# Altium PCB ISP_medium_main.PcbDoc
Units mm, origin at the board's own origin, x right, y up, seen from the top; angles counter-clockwise.
Board outline 24.4 x 77 mm, 2 copper layers (Top Layer, Bottom Layer); 30 components, 24 nets, 116 pads, 12 vias.
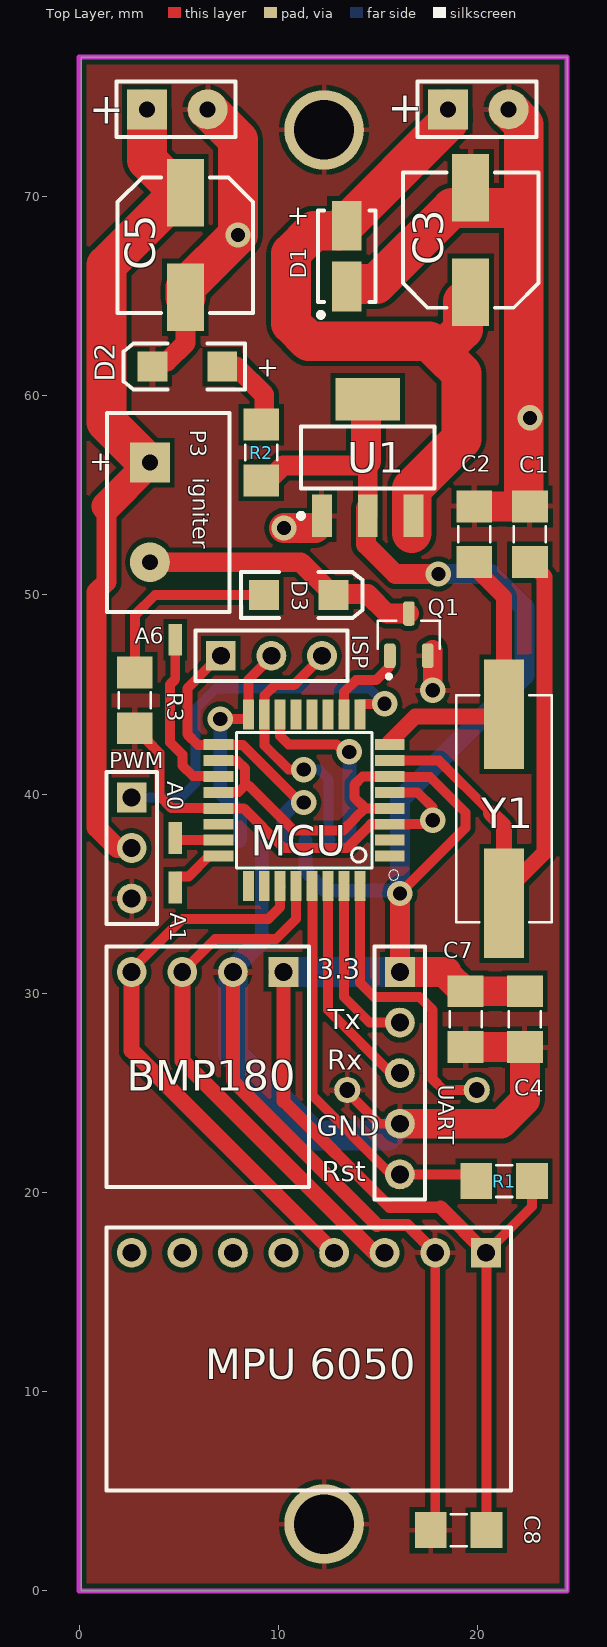
[diagram p0: Top Layer view]
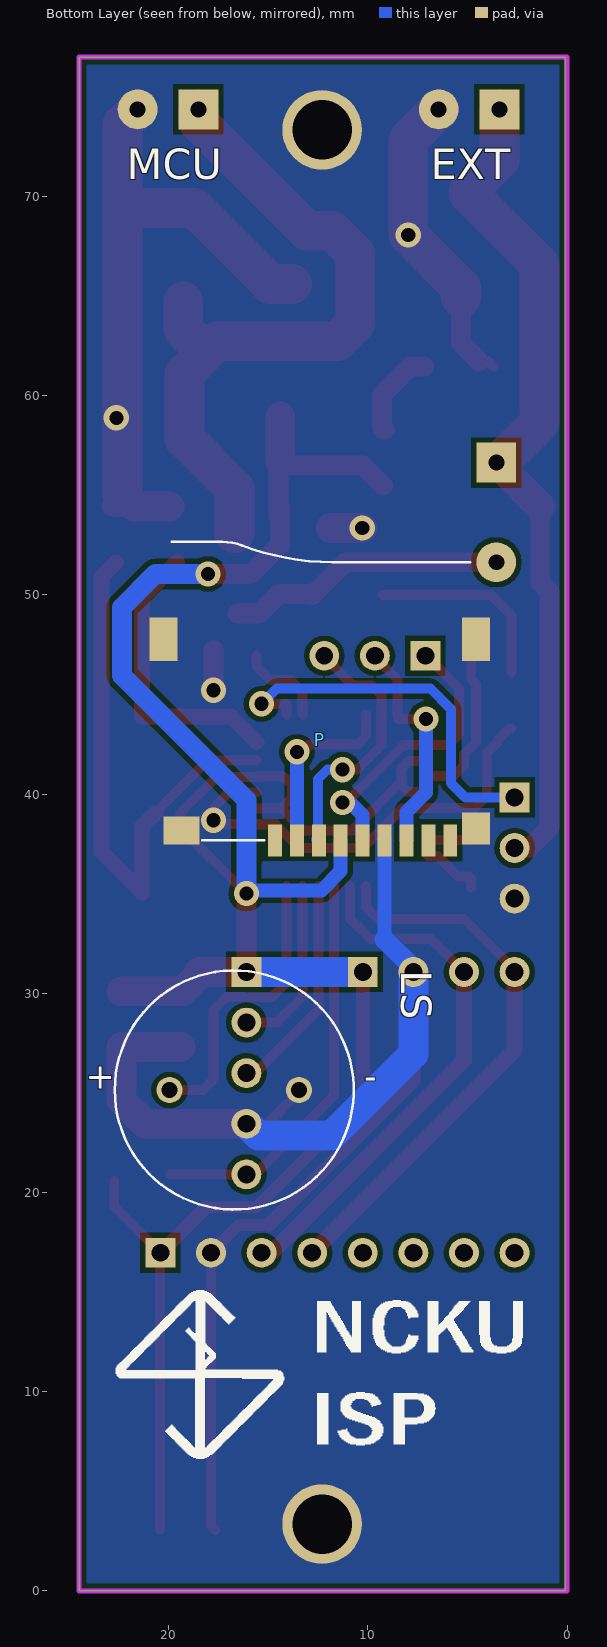
[diagram p1: Bottom Layer view, seen from below]

## Layer stack, top to bottom
Top Solder: solder mask 0.0102, Solder Resist, Dk 3.5
Top Layer: signal copper 0.0356
Dielectric 1: dielectric 0.32, FR-4, Dk 4.8
Bottom Layer: signal copper 0.0356
Bottom Solder: solder mask 0.0102, Solder Resist, Dk 3.5

## Board outline
0.099,77 0.099,0 24.5,0 24.5,77

## Design rules (kind name [scope] priority, off if disabled: settings)
Clearance Clearance_2 [InNamedPolygon('GND_L01_P002')] p1: gap=0.254 ignorepadtopadclearanceinfootprint=FALSE except(0: Arc-Hole Track-Hole SMDPad-Hole THPad-Hole Via-Hole Fill-Hole Poly-Hole Region-Hole Text-Hole)
Clearance Clearance_1 [InNamedPolygon('GND_L01_P002')] p2: gap=0.254 ignorepadtopadclearanceinfootprint=FALSE except(0: Arc-Hole Track-Hole SMDPad-Hole THPad-Hole Via-Hole Fill-Hole Poly-Hole Region-Hole Text-Hole)
Clearance [All] p3: gap=0.254 ignorepadtopadclearanceinfootprint=FALSE except(0: Arc-Hole Track-Hole SMDPad-Hole THPad-Hole Via-Hole Fill-Hole Poly-Hole Region-Hole Text-Hole; 0.1: SMDPad-SMDPad)
HoleSize [All] p1: absolutevalues=TRUE maxlimit=10 minlimit=0.025 maxpercent=80.000 minpercent=20.000
MinimumSolderMaskSliver [All] p1 off: minsoldermaskwidth=0.254
PolygonConnect direct_connect_2 [All vs IsNamedPolygon('GND_L02_P006')] p1: connectstyle=Direct reliefconductorwidth=0.254 reliefentries=4 polygonreliefangle="90 Angle" airgapwidth=0.254 // direct connect
PolygonConnect direct_connect_1 [All vs IsNamedPolygon('GND_L02_P006')] p2: connectstyle=Direct reliefconductorwidth=0.254 reliefentries=4 polygonreliefangle="90 Angle" airgapwidth=0.254
PolygonConnect direct_connect [All vs IsNamedPolygon('GND_L02_P006')] p3: connectstyle=Direct reliefconductorwidth=0.254 reliefentries=4 polygonreliefangle="90 Angle" airgapwidth=0.254
PolygonConnect PolygonConnect_2 [All vs IsNamedPolygon('GND_L01_P002')] p4: thpad.connectstyle=Relief thpad.reliefconductorwidth=0.254 thpad.reliefentries=4 thpad.polygonreliefangle="90 Angle" thpad.airgapwidth=0.5 smdpad.connectstyle=Relief smdpad.reliefconductorwidth=0.254 smdpad.reliefentries=4 smdpad.polygonreliefangle="90 Angle" smdpad.airgapwidth=0.254 via.connectstyle=Relief via.reliefconductorwidth=0.254 via.reliefentries=4 via.polygonreliefangle="90 Angle" via.airgapwidth=0.254
PolygonConnect PolygonConnect_1 [All vs IsNamedPolygon('GND_L01_P002')] p5: thpad.connectstyle=Relief thpad.reliefconductorwidth=0.254 thpad.reliefentries=4 thpad.polygonreliefangle="90 Angle" thpad.airgapwidth=0.5 smdpad.connectstyle=Relief smdpad.reliefconductorwidth=0.254 smdpad.reliefentries=4 smdpad.polygonreliefangle="90 Angle" smdpad.airgapwidth=0.254 via.connectstyle=Relief via.reliefconductorwidth=0.254 via.reliefentries=4 via.polygonreliefangle="90 Angle" via.airgapwidth=0.254
PolygonConnect [All] p6: connectstyle=Relief reliefconductorwidth=0.254 reliefentries=4 polygonreliefangle="90 Angle" airgapwidth=0.254
RoutingVias [All] p1: holewidth=0.711 width=1.27 viastyle="Through Hole" minholewidth=0.711 minwidth=1.27 maxholewidth=0.711 maxwidth=1.27
SilkToSolderMaskClearance [IsPad] p1: minsilkscreentomaskgap=0.17 clearancetoexposedcopper=TRUE
SolderMaskExpansion [All] p1: expansion=0.102
Width [All] p1: maxlimit=5 minlimit=0.254 preferedwidth=0.5
27 further rules are at their usual default settings.

## Components (designator, comment, footprint, x,y, rotation, side; value= is the part's Value field where it differs from the comment)
+ "PowerIn" PowerIn 18.514,74.378 r0 top (schematic designator P5)
+ "PowerIn" PowerIn 3.401,74.378 r0 top (schematic designator P4)
A0 "Extendable" Extendable 4.826,37.293 r0 top (schematic designator E1)
A1 "Extendable" Extendable 4.826,35.814 r180 top (schematic designator E2)
A6 "Extendable" Extendable 4.826,48.26 r180 top (schematic designator E5)
BMP180 "BMP180" BMP280 10.259,31.071 r180 top
C1 "22pF" CAP1602 22.631,53.046 r90 top
C2 "22pF" CAP1602 19.837,53.046 r270 top
C3 "470uF" CAPAE7066X77M 19.657,67.818 r90 top
C4 "22uF" CAP1602 22.377,28.702 r270 top
C5 "470uF" CAPAE7066X77M 5.334,67.564 r270 top
C7 "22pF" CAP1602 19.403,28.702 r90 top
C8 "22pF" CAP1602 19.05,3.048 r0 top
D1 "Diode" DIOM4227X24N 13.434,67.012 r90 top
D2 "LED2" 3.2X1.6X1.1 5.433,61.468 r180 top
D3 "LED2" 3.2X1.6X1.1 11.025,49.994 r0 top
ISP "ISP connector" "ISP connector" 7.112,46.946 r0 top (schematic designator P1)
LS "CEM-1201(42)" CUI_CEM-1201(42) 16.712,25.146 r180 bottom
MCU "*" QFP80P900X900X120-32N 11.293,39.688 r180 top
"MPU 6050" "Mpu Chip 8Pin" "Mpu 8Pin" 20.419,16.974 r180 top
P "ST-TF-003A" MicroSD 11.148,43.009 r0 bottom
P3 "MosOutput" KF126-2P-Connector 3.556,56.642 r270 top
PWM "Servo" Servo 2.639,39.834 r270 top
Q1 "MOSFET-N" SOT23-3 16.552,48.006 r90 top
R1 "Res1" "RES 1602" 21.336,20.574 r0 top value=10K
R2 "Res1" "RES 1602" 9.143,57.15 r270 top value=220
R3 "Res1" "RES 1602" 2.794,44.704 r90 top value=1k
U1 "AMS1117-3.3" SOT230P700X180-4N 14.489,56.896 r90 top
UART "UART" UART 16.101,31.071 r270 top
Y1 "Xtal" XTAL 21.336,39.263 r270 top

## Footprints (in the part's own frame and the unit in brackets; to place one, negate y for a bottom-side part, rotate by r counter-clockwise, add the part's x,y. Pads: shape width x height; smd on the part's side, far side on the other; paste and mask are expansions set on the pad)
3.2X1.6X1.1 [mm] "SMT LED; 2 Flat Leads"
  rect 1.5x1.5 smd: 1(-1.75,0) 2(1.75,0)
  silkscreen extent -2.9,-1.15 3.2,1.15
BMP280 [mm] "Connector; 4 Pins for I2C"
  rect 1.5x1.5 hole 0.9: 1(0,0)
  round 1.5 hole 0.9: 2(2.54,0) 3(5.08,0) 4(7.62,0)
  silkscreen extent -1.27,-1.27 8.89,10.8
CAP1602 [mm]
  rect 1.6x1.8 smd: 1(-1.4,0) 2(1.4,0)
  silkscreen extent -0.4,-0.8 0.4,0.8
CAPAE7066X77M [mm] "Aluminum Electrolytic Capacitor, Body 6.60x6.60x7.70mm, IPC Low Density"
  rect 3.4x1.85 smd: 1(-2.625,0) 2(2.625,0)
  silkscreen extent -3.4,-3.4 3.4,3.4, body extent -3.4,-3.4 3.4,3.4, height 7.7
CUI_CEM-1201(42) [mm]
  round 1.308 hole 0.8: M(3.25,0) P(-3.25,0)
  silkscreen extent -6,-6 6,6
DIOM4227X24N [mm] "Molded Diode, 2-Leads, Body 4.25x2.69mm, IPC Medium Density"
  rect 2.5x1.5 smd: 1(-1.525,0) 2(1.525,0)
  silkscreen extent -3.07,-1.45 2.3,1.45, body extent -2.3,-1.44 2.3,1.45, height 2.44
Extendable [mm]
  rect 0.7x1.6 smd: 1(0,0.508)
"ISP connector" [mm] "Connector; Header; 3 Position"
  rect 1.5x1.5 hole 0.9: 1(0,0)
  round 1.5 hole 0.9: 2(2.54,0) 3(5.08,0)
  silkscreen extent -1.27,-1.27 6.35,1.27
KF126-2P-Connector [mm] "Connector; Header; 2 Position"
  rect 2x2 hole 0.8: 1(0,0)
  round 2 hole 0.8: 2(5,0)
  silkscreen extent -2.5,-2.16 7.5,4
MicroSD [mm]
  rect 0.7x1.6 smd: 1(3.52,5.33) 2(2.42,5.33) 3(1.32,5.33) 4(0.22,5.33) 5(-0.88,5.33) 6(-1.98,5.33) 7(-3.08,5.33) 8(-4.18,5.33) 9(-5.28,5.33)
  rect 1.4x1.6 smd: G1(-6.58,4.73)
  rect 1.4x2.2 smd: G2(-6.58,-4.77) G3(9.12,-4.77)
  rect 1.8x1.4 smd: G4(8.22,4.83)
  silkscreen extent -6.29,-9.66 8.7,5.33
"Mpu 8Pin" [mm] "Connector; Header; 8 Position"
  rect 1.5x1.5 hole 0.9: 1(0,0)
  round 1.5 hole 0.9: 2(2.54,0) 3(5.08,0) 4(7.62,0) 5(10.16,0) 6(12.7,0) 7(15.24,0) 8(17.78,0)
  silkscreen extent -1.27,-1.27 19.05,11.94
PowerIn [mm] "Connector; Header; 2 Position"
  rect 2x2 hole 0.8: 1(0,0)
  round 2 hole 0.8: 2(3.048,0)
  silkscreen extent -1.52,-1.4 4.44,1.4
QFP80P900X900X120-32N [mm]
  rect 1.5x0.55 smd: 1(-4.3,2.8) 2(-4.3,2) 3(-4.3,1.2) 4(-4.3,0.4) 5(-4.3,-0.4) 6(-4.3,-1.2) 7(-4.3,-2) 8(-4.3,-2.8) 17(4.3,-2.8) 18(4.3,-2) 19(4.3,-1.2) 20(4.3,-0.4) 21(4.3,0.4) 22(4.3,1.2) 23(4.3,2) 24(4.3,2.8)
  rect 0.55x1.5 smd: 9(-2.8,-4.3) 10(-2,-4.3) 11(-1.2,-4.3) 12(-0.4,-4.3) 13(0.4,-4.3) 14(1.2,-4.3) 15(2,-4.3) 16(2.8,-4.3) 25(2.8,4.3) 26(2,4.3) 27(1.2,4.3) 28(0.4,4.3) 29(-0.4,4.3) 30(-1.2,4.3) 31(-2,4.3) 32(-2.8,4.3)
  silkscreen extent -4.75,-3.4 3.4,4
"RES 1602" [mm]
  rect 1.6x1.8 smd: 1(-1.4,0) 2(1.4,0)
  silkscreen extent -0.4,-0.8 0.4,0.8
Servo [mm] "Connector; Header; 3 Position"
  rect 1.5x1.5 hole 0.9: 1(0,0)
  round 1.5 hole 0.9: 2(2.54,0) 3(5.08,0)
  silkscreen extent -1.27,-1.27 6.35,1.27
SOT23-3 [mm]
  rrect50% 1.23x0.59 smd: 1(-1.06,0.95) 2(-1.06,-0.95) 3(1.06,0)
  silkscreen extent -2.2,-1.56 0.7,1.56
SOT230P700X180-4N [mm] "SOT223, 4-Leads, Body 6.50x7.00mm (avg), Pitch 2.30mm, IPC Medium Density"
  rect 2.15x1 smd: 1(-2.925,2.3) 2(-2.925,0) 3(-2.925,-2.3)
  rect 2.15x3.25 smd: 4(2.925,0)
  silkscreen extent -3.05,-3.35 1.55,3.47, body extent -1.85,-3.35 1.85,3.35, height 1.8
UART [mm] "Connector; Header; 5 Position, UART, for uploading"
  rect 1.5x1.5 hole 0.9: 1(0,0)
  round 1.5 hole 0.9: 2(2.54,0) 3(5.08,0) 4(7.62,0) 5(10.16,0)
  silkscreen extent -1.27,-1.27 11.43,1.27
XTAL [mm]
  rect 5.5x2 smd: 1(-4.75,0) 2(4.75,0)
  silkscreen extent -5.7,-2.4 5.7,2.4

## Part data
+ + P3: "Header, 2-Pin", LatestRevisionDate=17-Jul-2002, LatestRevisionNote="Re-released for DXP Platform.", Publisher="Altium Limited"
BMP180: "Chip Connector 4 Pin for BMP180", LatestRevisionDate=17-Jul-2002, LatestRevisionNote="Re-released for DXP Platform.", Publisher="Altium Limited"
C1 C2 C7 C8: "SMD Capacitor X6S(EIA) with Capacitance: 22pF", Package="1206 Murata", Availability=Warning, Check_prices=https://www.snapeda.com/parts/GRM319C81C106MA12J/Murata/view-part/1894707/?ref=eda, MF=Murata, MP=GRM319C81C106MA12J, Price=None, Purchase-URL=https://pricing.snapeda.com/search/part/GRM319C81C106MA12J/?ref=eda, SnapEDA_Link=https://www.snapeda.com/parts/GRM319C81C106MA12J/Murata/view-part/1894707/?ref=snap
C3 C5: "470£gF 16V Aluminum Electrolytic Capacitors Radial", Package="Radial Panasonic", Availability=Unavailable, MF=Panasonic, MP=EEE-FC1C471AP, Price=None, SnapEDA_Link=https://www.snapeda.com/parts/EEE-FC1C471AP/Panasonic%20Electronic%20Components/view-part/51969/?ref=snap
C4: library part 100nF, "SMD Capacitor X6S(EIA) with Capacitance: 22pF", Package="1206 Murata", Availability=Warning, Check_prices=https://www.snapeda.com/parts/GRM319C81C106MA12J/Murata/view-part/1894707/?ref=eda, MF=Murata, MP=GRM319C81C106MA12J, Price=None, Purchase-URL=https://pricing.snapeda.com/search/part/GRM319C81C106MA12J/?ref=eda, SnapEDA_Link=https://www.snapeda.com/parts/GRM319C81C106MA12J/Murata/view-part/1894707/?ref=snap
D1: "Default Diode", Code_JEDEC=DO-214-AB, LatestRevisionDate=17-Jul-2002, LatestRevisionNote="Re-released for DXP Platform.", PackageDescription="DO-214-AB/SMC; 2 C-Bend Leads; Body 7.9 x 5.9 mm, inc. leads (LxW)", PackageReference=SMC, PackageVersion=Sep-1996, Published=8-Jun-2000, Publisher="Altium Limited"
D2 D3: "Typical RED, GREEN, YELLOW, AMBER GaAs LED", LatestRevisionDate=17-Jul-2002, LatestRevisionNote="Re-released for DXP Platform.", PackageDescription="SM LED; 2 Flat Leads", PackageReference=3.2X1.6X1.1, PackageVersion=Feb-2002, Published=8-Jun-2000, Publisher="Altium Limited"
ISP PWM: "Header, 3-Pin", LatestRevisionDate=17-Jul-2002, LatestRevisionNote="Re-released for DXP Platform.", Publisher="Altium Limited"
LS: "12 mm, 1,5 V, 85 dB, furo passante, campainha elActrica transdutora de A!udio magnActica", Package="CUI Inc.", Availability=Unavailable, CUI_purchase_URL=https://www.cuidevices.com/product/audio/buzzers/audio-transducers/cem-1201_42_?utm_source=snapeda.com&utm_medium=referral&utm_campaign=snapedaBOM, MF="CUI Devices", MP=CEM-1201_42_, Price=None, SnapEDA_Link=https://www.snapeda.com/parts/CEM-1201%2842%29/CUI%20Devices/view-part/2755977/?ref=snap
MCU: library part ATMEGA328P-AU, "AVR AVRAR ATmega Microcontroller IC 8-Bit 20MHz 32KB _16K x 16_ FLASH 32-TQFP _7x7_", Package="TQFP-32 Microchip Technology", Availability=Unavailable, MF="Microchip Technology", MP=ATMEGA328P-AU, Price=None, SnapEDA_Link=https://www.snapeda.com/parts/ATMEGA328P-AU/Microchip/view-part/4593405/?ref=snap
"MPU 6050": library part "Chip Mpu 8Pin", "Chip Mpu 8Pin", LatestRevisionDate=17-Jul-2002, LatestRevisionNote="Re-released for DXP Platform.", Publisher="Altium Limited"
P: "Micro SD Card Socket", Package=None, Availability=Unavailable, MF=Suntech, MP=ST-TF-003A, Price=None, SnapEDA_Link=https://www.snapeda.com/parts/ST-TF-003A/Suntech/view-part/214778/?ref=snap
Q1: "N-Channel MOSFET", LatestRevisionDate=17-Jul-2002, LatestRevisionNote="Re-released for DXP Platform.", PackageDescription="TO, Flat Index; 3 In-Line, Axial Leads; Body Dia. 4.6mm; Lead Dia. 0.5 mm (max)", PackageReference=E3, PackageVersion=1995/1996, Published=8-Jun-2000, Publisher="Altium Limited"
R1 R2 R3: "Resistor", LatestRevisionDate=17-Jul-2002, LatestRevisionNote="Re-released for DXP Platform.", PackageDescription="Axial Device, Thru-Hole; 2 Leads; 0.3 in Pin Spacing", PackageReference=AXIAL-0.3, Published=8-Jun-2000, Publisher="Altium Limited"
U1: "Sot223/Pkg 1-Amp 3.3-Volt Low Drop Out Voltage Regulatator", Package=None, Availability=Unavailable, MF="Advanced Monolithic Systems", MP=AMS1117-3.3, Price=None, SnapEDA_Link=https://www.snapeda.com/parts/AMS1117-3.3/Advanced%20Monolithic%20Systems/view-part/53450/?ref=snap
UART: "Header, 5-Pin, UART, for uploading", LatestRevisionDate=17-Jul-2002, LatestRevisionNote="Re-released for DXP Platform.", Publisher="Altium Limited"
Y1: Package="HC49/US ECS International", Arrow_Electronics-Purchase-URL=https://snapeda.com/shop?store=Arrow+Electronics&id=2461451, Availability=Good, DigiKey-Purchase-URL=https://snapeda.com/shop?store=DigiKey&id=2461451, MF="ECS Inc.", Mouser-Purchase-URL=https://snapeda.com/shop?store=Mouser&id=2461451, MP=ECS-122.8-18-5PXEN-TR, Price=None, SnapEDA_Link=https://www.snapeda.com/parts/ECS-122.8-18-5PXEN-TR/ECS%20Inc./view-part/2461451/?ref=snap

## Free pads (board coordinates)
  round 4 hole 3: 2(12.3,73.35) 2(12.3,3.35)

## Via types
v1: diameter 1.27, hole 0.711, Top Layer to Bottom Layer, tented both sides, 12 vias

## Nets (pads, with @x,y where several pads share a name; then routed paths per layer and width w, separated by ;. In a path a pad name is that pad's centre, name@x,y a point inside that pad or via, vN(x,y) a via of type N, cw(c..) or ccw(c..) an arc to the next point about the centre after c; other vN are vias at no path point)
3.3V: "MPU 6050.1" BMP180.1 C4.1 C7.2 C8.2 MCU.4 MCU.6 MCU.18 MCU.20 P.4 R1.2 R2.2 U1.2 U1.4 UART.1 | length 125.7
  Top Layer w0.5: MCU.20 7.014,40.109 7.993,40.109 8.32,40.436 8.32,41.299 7.952,41.667 7.014,41.667 MCU.18 ; 8.514,40.436 10.767,38.183 13.256,38.183 13.88,38.807 13.88,38.821 14.322,39.263 14.336,39.263 14.361,39.288 ; MCU.4 14.361,39.288 ; v1(16.101,35.008) 19.403,38.31 19.403,39.072 17.608,40.867 15.614,40.867 MCU.6 14.234,40.888 13.815,40.469 13.815,39.834 14.361,39.288 ; C8.2 20.45,16.943 20.419,16.974 22.736,19.291 R1.2
  Top Layer w0.6: 10.259,24.594 15.593,19.26 18.133,19.26
  Top Layer w0.7: 10.259,24.594 BMP180.1 ; 18.133,19.26 20.419,16.974
  Top Layer w1: R2.2@9.243,55.496 10.246,56.499 14.489,56.499 ; U1.2@14.402,54.36 14.402,52.532 15.88,51.054 v1@17.81,51.054 ; 14.402,56.728 14.489,56.641 14.489,56.499 ; U1.2 14.489,56.499 ; UART.1 v1(16.101,35.008) ; 18.459,30.946 18.459,31.071 ; C7.2@19.303,30.102 C7.2
  Top Layer w1.5: 14.402,56.728 U1.4@14.402,58.957 ; UART.1 18.459,31.071 ; 18.459,30.946 C7.2@19.303,30.102 ; C7.2 C4.1
  Bottom Layer w0.7: P.4 11.368,36.132 12.331,35.169 15.94,35.169 v1(16.101,35.008)
  Bottom Layer w1: v1(16.101,35.008) 16.101,39.707 22.352,45.958 22.352,49.375 20.673,51.054 v1(18.034,51.054)
  Bottom Layer w1.5: BMP180.1 UART.1
GND: "MPU 6050.2" +.2 BMP180.2 C1.2 C2.1 C3.2 C4.2 C5.2 C7.1 C8.1 D1.1 D2.2 LS.M MCU.3 MCU.5 MCU.21 P.6 P.G1 P.G2 P.G3 P.G4 pad.2 PWM.3 Q1.2 R3.1 U1.1 UART.4 | length 150.4
  Top Layer w0.5: R3.1 2.894,43.304 3.444,42.754 3.444,42.654 4.036,42.062 4.036,39.898 4.625,39.309 6.972,39.309 MCU.21 8.265,39.288 10.259,37.294 13.461,37.294 14.634,38.467 15.593,38.467 16.552,38.467 ; D2.2 3.937,61.722 D2.2@4.417,61.722 ; U1.1@11.852,53.361 12.102,53.111 U1.1@12.102,53.107 ; D1.1@13.434,65.234 D1.1@13.815,65.615 ; LS.M 13.462,25.048 15.059,23.451 UART.4 ; 14.634,38.509 15.593,38.509 16.552,38.509 v1@17.752,38.509 ; MCU.5 16.99,40.088 17.752,39.326 v1(17.752,38.691) ; C8.1 17.879,3.277 17.879,16.974 ; v1@18.006,38.509 v1@17.951,38.509 ; 21.814,64.47 22.324,64.98 ; v1@17.752,38.509 v1(17.752,38.691) ; v1@17.752,38.509 v1@17.951,38.509 ; v1@17.752,38.509 17.752,38.31 v1@17.951,38.509 ; v1(17.752,38.691) 17.769,38.691 v1@17.951,38.509
  Top Layer w0.6: 14.958,18.371 16.482,18.371 17.879,16.974
  Top Layer w0.7: BMP180.2 7.719,25.61 14.958,18.371
  Top Layer w1: D2.2@4.417,61.722 5.334,62.639 C5.2 ; v1(17.752,45.212) Q1.2@17.752,47.244 ; 21.731,54.446 C1.2 C1.2@22.885,54.446
  Top Layer w1.5: v1(10.287,53.361) U1.1@11.852,53.361 ; UART.4 21.19,23.451 22.377,24.638 C4.2 C7.1 ; C2.1@19.964,54.446 21.731,54.446 C1.2@22.324,55.039
  Top Layer w2: C5.2 5.334,65.448 7.958,68.072 v1(7.973,68.072) 7.973,72.854 +.2@6.449,74.378 ; D1.1@13.815,65.615 14.914,65.615 18.724,69.425 22.324,69.425 ; +.2@21.562,74.378 22.324,73.616 22.324,69.425 ; C1.2@22.324,55.039 22.324,64.98 22.324,69.425
  Bottom Layer w0.7: 9.168,32.703 P.6
  Bottom Layer w1: BMP180.2@7.644,31.178 9.168,32.703
  Bottom Layer w1.5: BMP180.2 7.719,26.952 11.811,22.86 15.51,22.86 UART.4
  other v1: 22.631,58.891
NetBMP180_3: "MPU 6050.3" BMP180.3 MCU.28 | length 27.1
  Top Layer w0.5: BMP180.3 6.83,32.722 9.878,32.722 10.893,33.737 MCU.28 ; 14.831,16.974 15.339,16.974
  Top Layer w0.8: BMP180.3 5.179,26.626 14.831,16.974
NetBMP180_4: "MPU 6050.4" BMP180.4 MCU.27 | length 28.3
  Top Layer w0.5: BMP180.4 2.639,31.198 5.179,33.738 9.497,33.738 10.093,34.334 MCU.27 MCU.27@10.114,35.367
  Top Layer w0.8: BMP180.4 2.639,27.134 12.799,16.974
NetC1_1: C1.1 MCU.7 Y1.2 | length 28.2
  Top Layer w0.5: MCU.7 18.057,41.688 20.673,39.072 20.673,39.04
  Top Layer w0.8: 20.673,39.04 21.336,38.377 21.336,35.061 23.368,37.093 23.368,50.909 C1.1@22.638,51.639
NetC2_2: C2.2 MCU.8 Y1.1 | length 14.7
  Top Layer w0.8: MCU.8@15.593,42.617 16.874,43.898 21.336,43.898 Y1.1 21.336,49.892 C2.2@19.589,51.639
NetD2_1: D2.1 R2.1 | length 4.6
  Top Layer w1: D2.1 7.874,61.468 9.293,60.049 9.293,58.446 9.143,58.296 R2.1@9.243,58.296
NetD3_1: D3.1 R3.2 | length 9.8
  Top Layer w0.5: R3.2 2.794,48.978 3.81,49.994 D3.1
NetD3_2: D3.2 P3.2 Q1.3 | length 14.1
  Top Layer w1: P3.2 11.127,51.642 D3.2 12.819,50.038 14.489,50.038 15.461,49.066 Q1.3
NetE1_1: A0.1 MCU.23 | length 2.2
  Top Layer w0.5: A0.1 4.826,37.788 4.926,37.688 MCU.23
NetE2_1: A1.1 MCU.24 | length 3.1
  Top Layer w0.5: A1.1 4.826,35.756 4.926,35.856 5.486,35.856 6.518,36.888 MCU.24
NetE5_1: A6.1 MCU.19 | length 8.7
  Top Layer w0.5: A6.1 4.826,45.766 4.572,45.512 4.572,42.599 5.179,41.992 5.179,41.441 5.711,40.909 6.972,40.909 MCU.19
NetLS_P: LS.P MCU.32 | length 15
  Top Layer w0.5: MCU.32 14.093,30.539 14.815,29.817 17.098,29.817 17.752,29.163 17.752,25.682 18.288,25.146 LS.P
NetMCU_9: MCU.9 PWM.1 | length 19.2
  Top Layer w0.5: MCU.9 14.093,44.533 v1(15.339,44.533)
  Bottom Layer w0.5: PWM.1 5.111,39.834 5.842,40.565 5.842,44.279 6.858,45.295 14.577,45.295 v1(15.339,44.533)
NetMCU_10: MCU.10 Q1.1 | length 4.5
  Top Layer w0.5: MCU.10@13.272,44.009 MCU.10 13.293,45.119 13.894,45.72 14.898,45.72 15.602,46.424 Q1.1
NetMCU_14: MCU.14 P.2 | length 9.1
  Top Layer w0.5: MCU.14 10.093,42.921 10.513,42.501 12.926,42.501 13.307,42.12 v1(13.561,42.12)
  Bottom Layer w0.7: P.2 v1@13.568,41.866
NetMCU_15: ISP.3 MCU.15 P.3 | length 13
  Top Layer w0.5: v1(11.275,41.231) 10.52,41.231 9.314,42.437 9.314,43.967 MCU.15 9.314,44.009 9.314,44.947 9.833,45.466 10.771,45.466 11.783,46.478 11.783,46.946 ISP.3@11.783,47.2
  Bottom Layer w0.5: v1@11.656,41.231 12.037,41.231 12.514,40.754 P.3@12.514,37.725
  Bottom Layer w0.7: P.3 P.3@12.514,37.725
NetMCU_16: ISP.2 MCU.16 P.7 | length 11.6
  Top Layer w0.5: v1(7.084,43.771) MCU.16@8.493,43.771 ; MCU.16@8.403,43.898 8.514,44.009 8.514,45.753 9.243,46.482 9.243,46.946 ISP.2@9.243,47.2
  Bottom Layer w0.7: v1(7.084,43.771) 7.084,40.088 8.068,39.104 P.7
NetMCU_17: ISP.1 MCU.17 P.5 | length 14.5
  Top Layer w0.5: ISP.1@6.703,47.2 6.703,46.577 5.433,45.307 5.433,43.009 5.975,42.467 6.993,42.467 8.218,42.467 11.105,39.58 v1(11.275,39.58)
  Bottom Layer w0.5: v1@10.894,39.58 v1(11.275,39.58)
  Bottom Layer w0.7: P.5 10.268,38.954 v1@10.894,39.58
NetMCU_29: MCU.29 R1.1 UART.5 | length 20.4
  Top Layer w0.5: MCU.29 11.714,35.367 11.714,24.862 15.665,20.911 UART.5 R1.1@19.936,20.911
NetMCU_30: MCU.30 UART.3 | length 11.1
  Top Layer w0.5: MCU.30 12.493,29.163 15.665,25.991 UART.3
NetMCU_31: MCU.31 UART.2 | length 8.9
  Top Layer w0.5: MCU.31 13.293,29.815 14.577,28.531 UART.2
Vin1: +.1@18.514,74.378 C3.1 D1.2 U1.3 | length 36.4
  Top Layer w0.5: 12.545,68.284 D1.2@13.055,68.284
  Top Layer w2: 12.545,68.284 11.785,68.284 10.64,67.139 10.64,63.627 11.529,62.738 17.581,62.738 18.133,62.186 ; D1.2@13.055,68.284 13.371,68.6 18.514,73.743 +.1@18.514,74.378 ; U1.3@16.702,53.107 16.702,55.335 19.202,57.836 19.202,61.117 18.133,62.186 ; C3.1@19.276,64.726 19.276,63.329 18.133,62.186
Vin2: +.1@3.401,74.378 C5.1 P3.1 PWM.2 | length 42.2
  Top Layer w1: 1.369,54.455 1.369,50.645 0.881,50.157 0.881,38.331 1.918,37.294 PWM.2 ; P3.1@3.413,56.499 P3.1@3.413,56.642
  Top Layer w1.5: 1.369,54.455 P3.1@3.413,56.499
  Top Layer w2: +.1@3.401,74.378 3.401,71.838 4.925,70.314 4.925,70.104 1.381,66.56 1.381,58.674 P3.1@3.413,56.642
pads on no net: "MPU 6050.5" "MPU 6050.6" "MPU 6050.7" "MPU 6050.8" MCU.1 MCU.2 MCU.11 MCU.12 MCU.13 MCU.22 MCU.25 MCU.26 P.1 P.8 P.9

## Polygon pours and split planes (outlines as drawn)
GND on Top Layer "GND_L01_P008" (solid, pour order 8): 0,77 0,0 24.246,0 24.5,0.254 24.384,0.37 24.384,77
GND on Bottom Layer "GND_L02_P006" (solid, pour order 6): 0,76.931 0,-0.069 24.5,-0.069 24.5,76.777 24.384,76.893

## Keep-outs
Keep-Out Layer:
  lines w0.254: 0,0 24.5,0 24.5,77 0,77 0,0

## Silkscreen, mask and mechanical layers (free items; w line width, h text height)
Top Overlay:
  text "+" at 10.414,68.58 h1
  text "+" at 8.89,60.96 h1
  text "+" at 0.508,56.242 h1
  text "igniter" at 5.711,55.88 h0.8 r270
  text "3.3" at 11.938,30.734 h1
  text "Tx" at 12.493,28.194 h1
  text "Rx" at 12.446,26.162 h1
  text "GND" at 11.938,22.86 h1
  text "Rst" at 12.189,20.574 h1
Bottom Overlay:
  drawing of 8 lines, arcs and shapes, not listed
  text "EXT" at 6.858,70.866 h1.52
  text "MCU" at 22.098,70.866 h1.52

## Text inside footprints (layer, text, board x,y; h text height)
LS: Bottom Overlay "-" at 10.193,25.211 h1.27; Bottom Overlay "+" at 24.173,25.211 h1.27